# Altium PCB AAS_module_rev1_2_PANEL.PcbDoc
Units mm, origin at the board's own origin, x right, y up, seen from the top; angles counter-clockwise.
Board outline 166 x 166 mm, 2 copper layers (Component Side, Bottom Layer), stack 0.971 mm thick; 4 components, 108 nets, 4 pads, 0 vias.
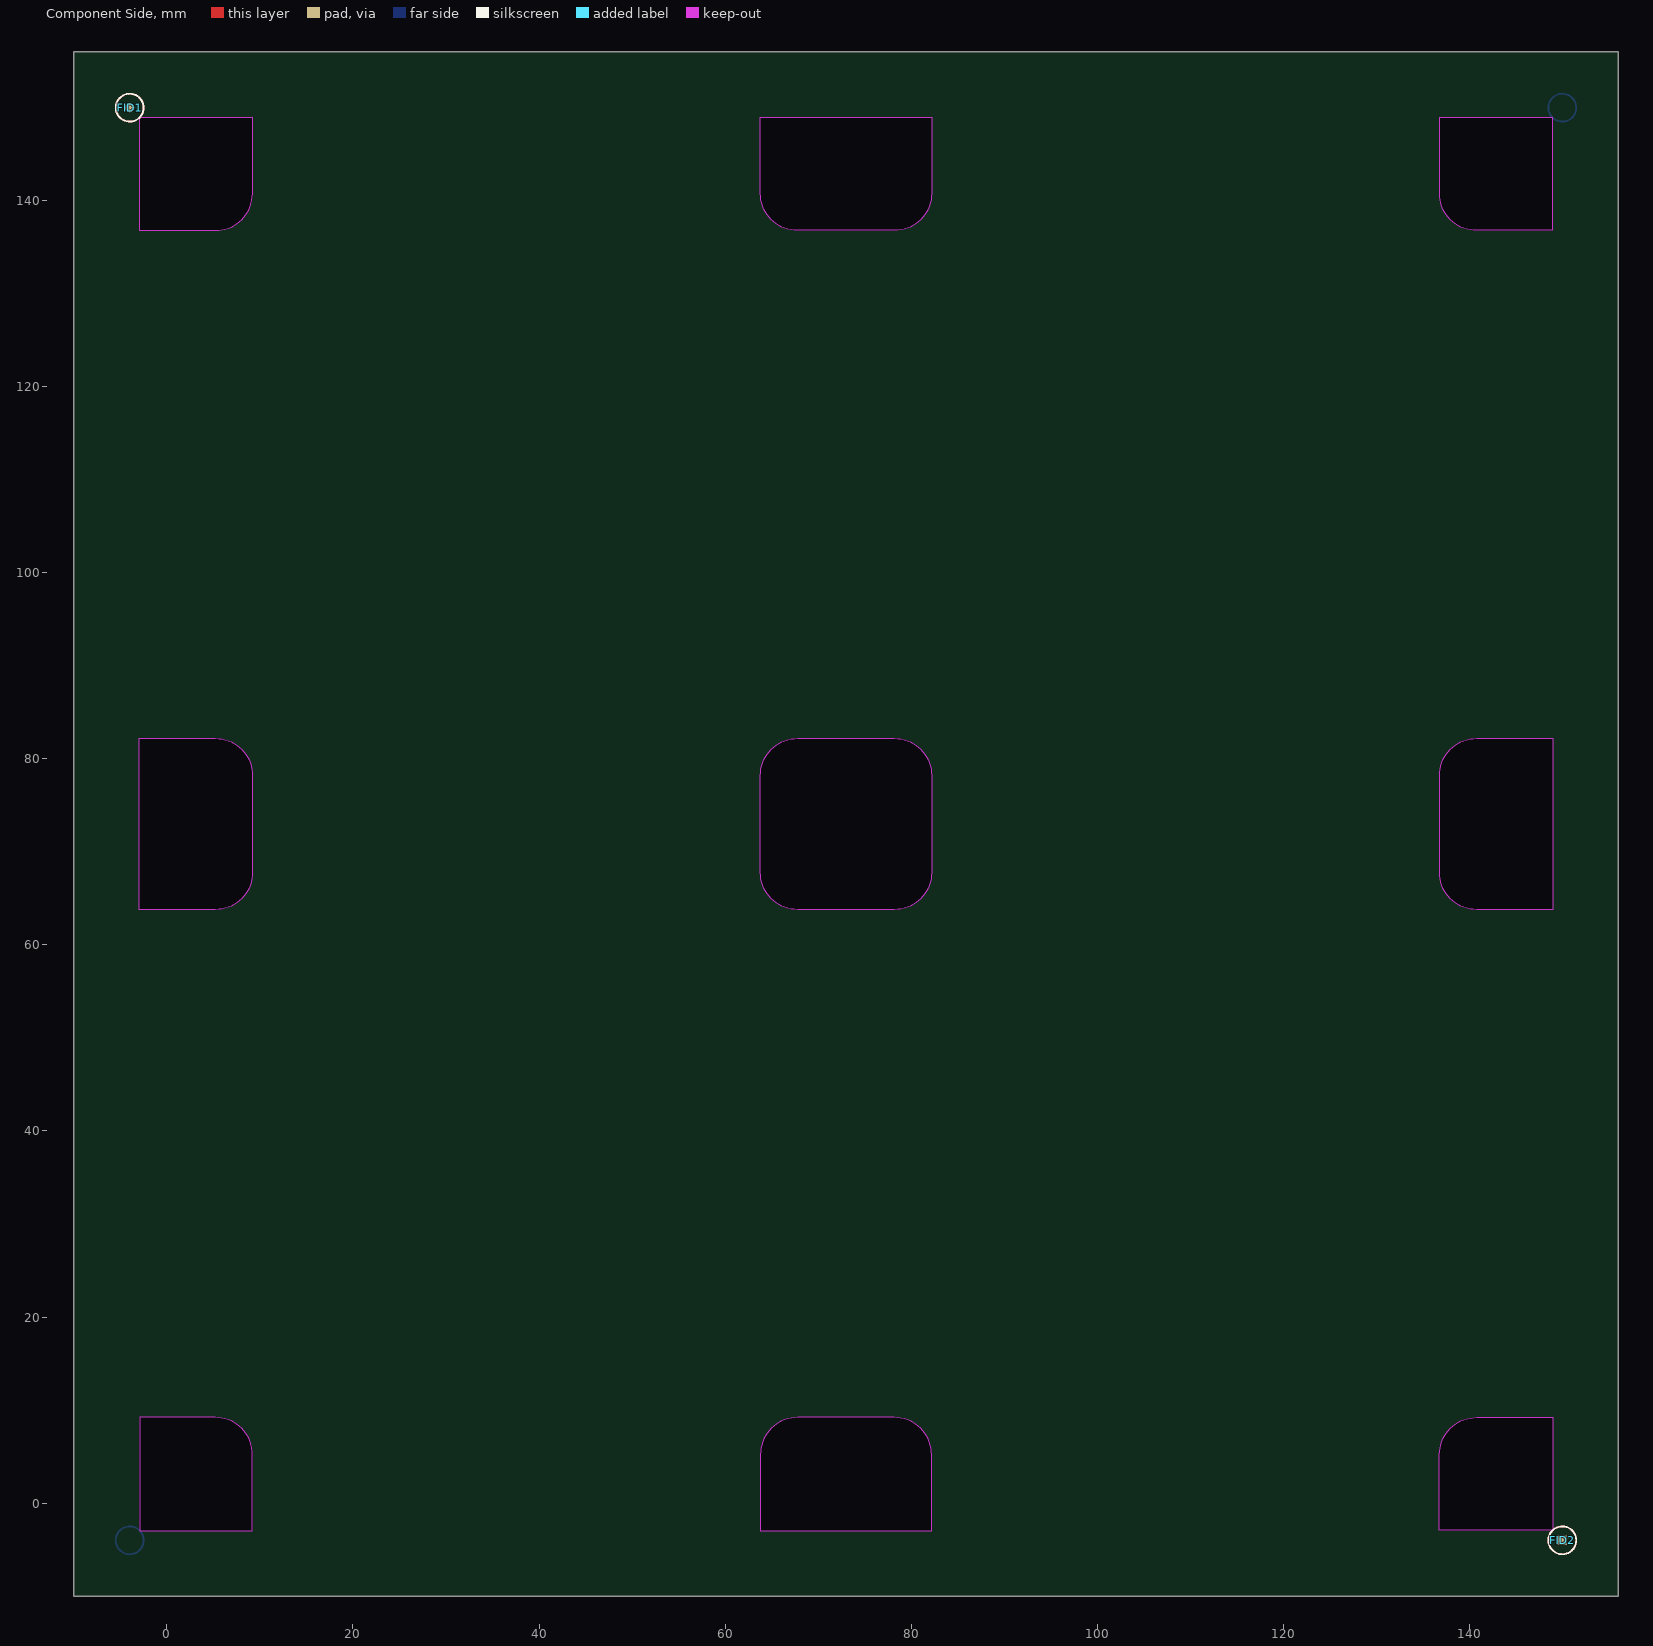
[diagram p0: Component Side view]
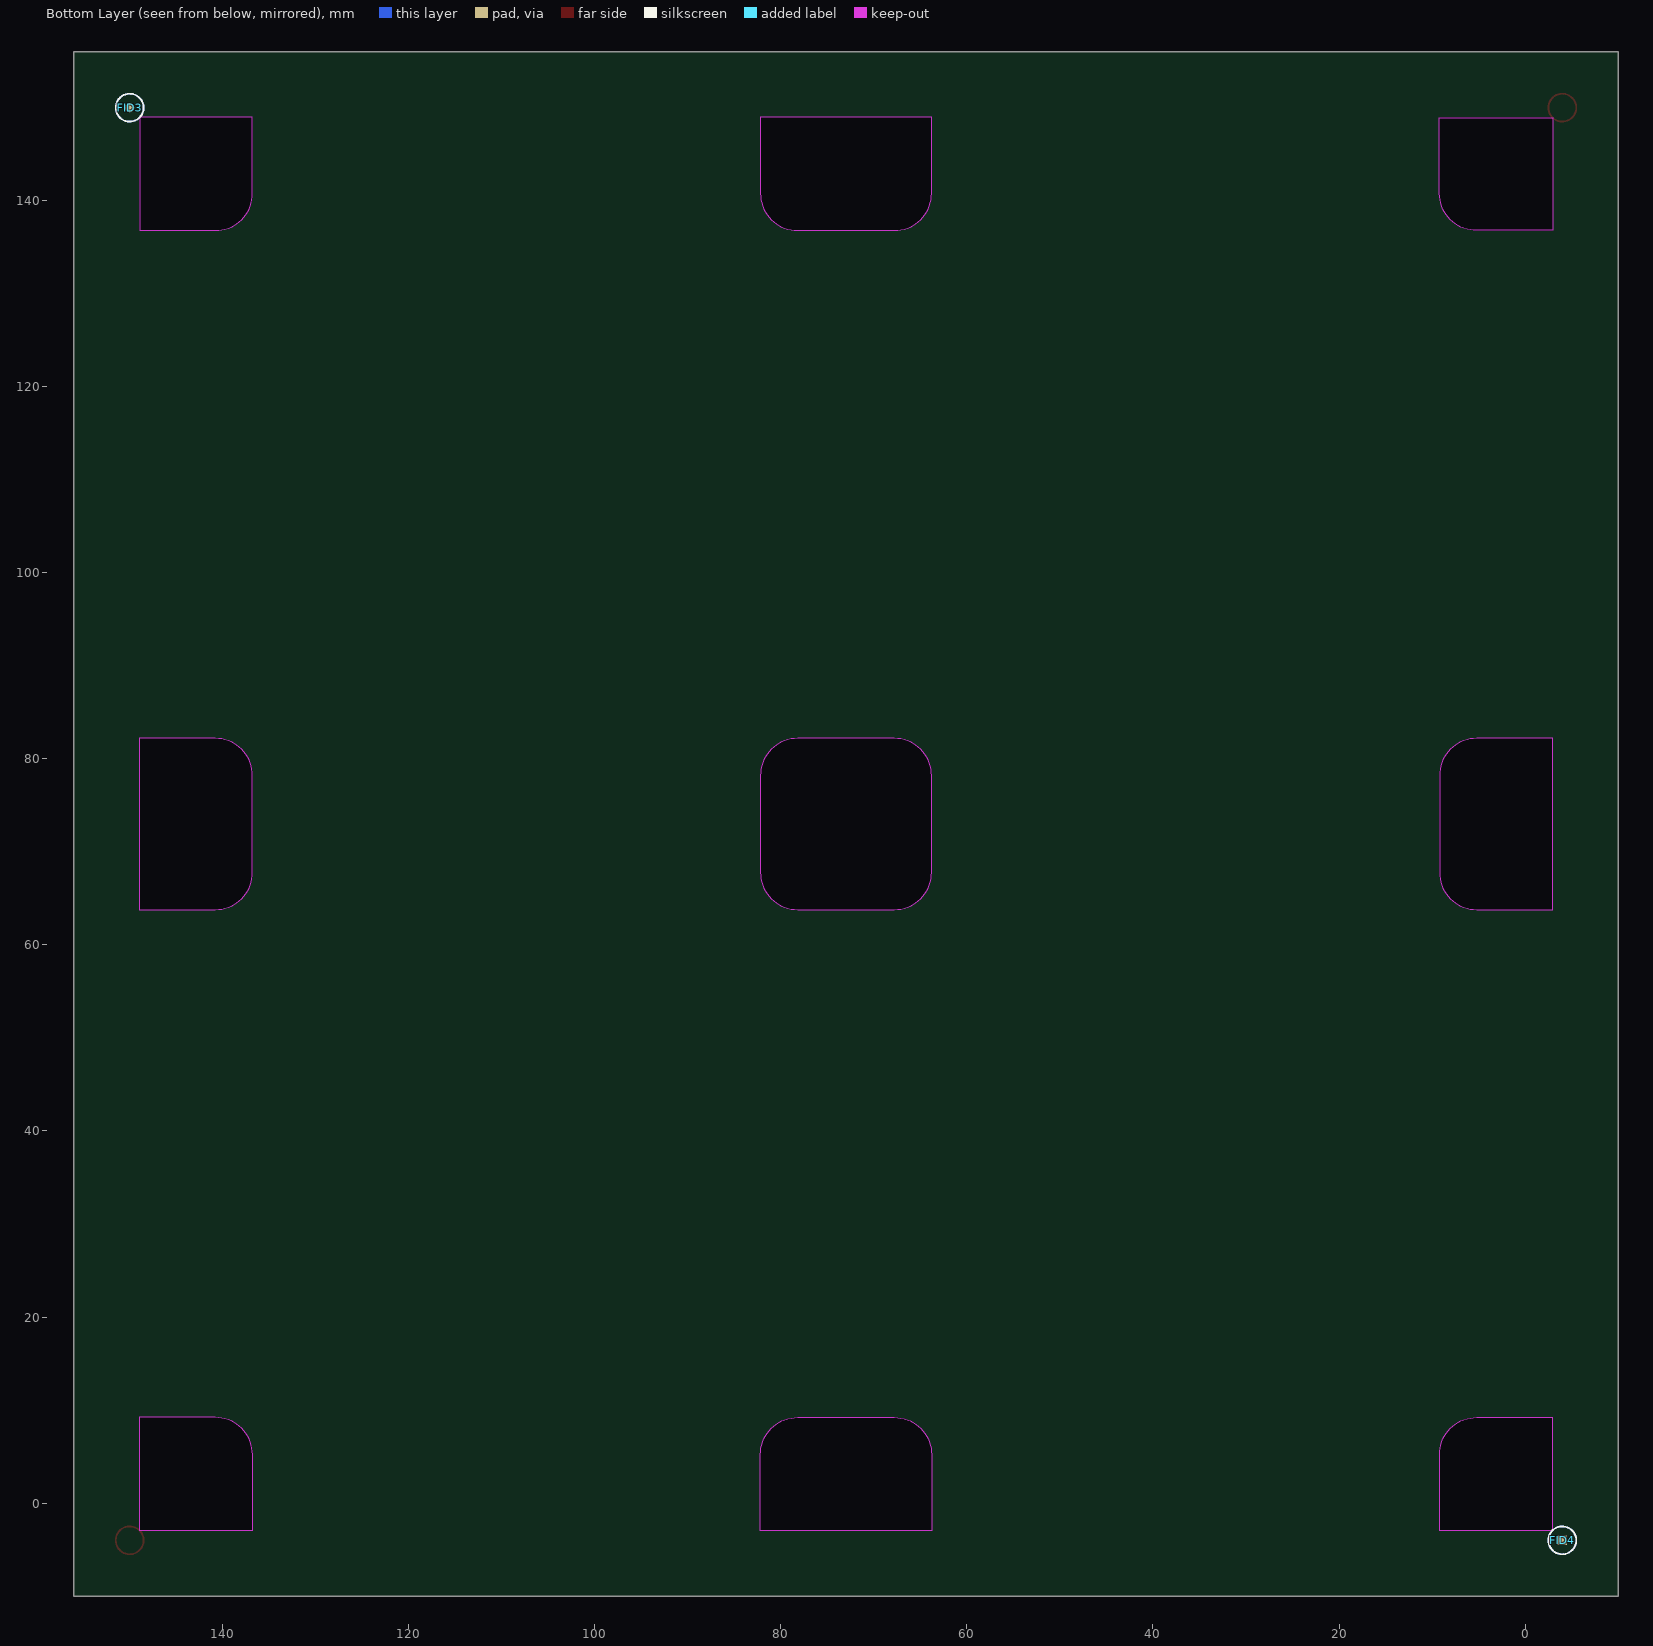
[diagram p1: Bottom Layer view, seen from below]

## Layer stack, top to bottom
Top Solder: solder mask 0.0102, Solder Resist, Dk 3.5
Component Side: signal copper 0.0356
Dielectric 1: core 0.9, FR-4, Dk 4.2
Bottom Layer: signal copper 0.0356
Solder Side: solder mask 0.0102, Solder Resist, Dk 3.5

## Board outline
-10,-10 -10,156 156,156 156,-10
cut-out: 136.8,140.8 136.8,149 148.9,149 148.9,136.8 140.8,136.8 cw(c140.8,140.8)
cut-out: -3,136.8 5.2,136.8 ccw(c5.2,140.8) 9.2,140.8 9.2,148.9 -3,148.9
cut-out: -2.9,-2.999 9.2,-2.999 9.2,5.201 ccw(c5.2,5.201) 5.2,9.201 -2.9,9.201
cut-out: 136.8,-2.9 136.8,5.2 cw(c140.8,5.2) 140.8,9.2 149,9.2 149,-2.9
cut-out: 136.8,67.8 136.8,78.2 cw(c140.8,78.2) 140.8,82.2 149,82.2 149,63.8 140.8,63.8 cw(c140.8,67.8)
cut-out: 136.8,67.8
cut-out: 136.8,67.8
cut-out: 67.8,136.8 cw(c67.8,140.8) 63.8,140.8 63.8,149 82.2,149 82.2,140.8 cw(c78.2,140.8) 78.2,136.8
cut-out: 63.8,-3 82.2,-3 82.2,5.2 ccw(c78.2,5.2) 78.2,9.2 67.8,9.2 ccw(c67.8,5.2) 63.8,5.2
cut-out: 136.8,67.8
cut-out: -3,63.8 -3,82.2 5.2,82.2 cw(c5.2,78.2) 9.2,78.2 9.2,67.8 cw(c5.2,67.8) 5.2,63.8
cut-out: 136.8,67.8
cut-out: 63.8,67.8 63.8,78.2 cw(c67.8,78.2) 67.8,82.2 78.2,82.2 cw(c78.2,78.2) 82.2,78.2 82.2,67.8 cw(c78.2,67.8) 78.2,63.8 67.8,63.8 cw(c67.8,67.8)

## Design rules (kind name [scope] priority, off if disabled: settings)
Clearance USB_THT_hole [(ObjectKind = 'Pad') And (Layer = 'MultiLayer') And (Component = 'J200')] p1: gap=0 ignorepadtopadclearanceinfootprint=FALSE
Clearance Outline [IsBoardCutoutRegion] p2: gap=0 ignorepadtopadclearanceinfootprint=FALSE
Clearance Global [All] p3: gap=0.2 ignorepadtopadclearanceinfootprint=FALSE except(0: Arc-Hole Track-Hole SMDPad-Hole THPad-Hole Via-Hole Fill-Hole Poly-Hole Region-Hole Text-Hole)
ComponentClearance ComponentClearance_2 [All] p1 off: gap=0.254 collisioncheckmode=3 verticalgap=0.254 showdistances=FALSE
ComponentClearance [All] p2 off: gap=0.254 collisioncheckmode=3 verticalgap=0.254 showdistances=FALSE
DiffPairsRouting ETHERNET_GAP [InDifferentialPairClass('ETHERNET')] p1: maxlimit=0.508 minlimit=0.305 mostfreqgap=0.305 toplayer_minwidth=0.152 toplayer_maxwidth=0.305 toplayer_prefwidth=0.305 bottomlayer_minwidth=0.152 bottomlayer_maxwidth=0.305 bottomlayer_prefwidth=0.305 maxuncoupledlength=10
DiffPairsRouting USB_GAP [InDifferentialPairClass('USB')] p2: maxlimit=0.508 minlimit=0.203 mostfreqgap=0.305 toplayer_minwidth=0.152 toplayer_maxwidth=0.203 toplayer_prefwidth=0.203 bottomlayer_minwidth=0.152 bottomlayer_maxwidth=0.203 bottomlayer_prefwidth=0.203 maxuncoupledlength=10
FabricationTestPointUsage TestPointUsage [All] p1: valid=0 allowmultiple=FALSE
FabricationTestpoint Testpoint [All] p1: side=3 testpointundercomponent=TRUE minsize=1.016 maxsize=2.54 preferedsize=1.524 minholesize=0.508 maxholesize=1.016 preferedholesize=0.813 testpointgrid=0.025 allowsidetop=TRUE allowsidebottom=TRUE usegrid=TRUE gridtolerance=0
Height [All] p1: minheight=0 maxheight=35 prefheight=12.7
HoleSize [All] p1: absolutevalues=TRUE maxlimit=6 minlimit=0.3 maxpercent=80.000 minpercent=20.000
MaxMinImpedance [InNetClass('HDMI')] p1: minimum=90,00 maximum=110,0
MinimumSolderMaskSliver [All] p1: minsoldermaskwidth=0.145
PolygonConnect DIODE [IsNamedPolygon('NETC18_1_L01_P010')  OR IsNamedPolygon('NETC18_1_L02_P011')    OR IsNamedPolygon('NETC22_1_L01_P015')    OR IsNamedPolygon('DIODE_C_BOTTOM')] p1: connectstyle=Direct reliefconductorwidth=0.254 reliefentries=4 polygonreliefangle="90 Angle" airgapwidth=0.254
PolygonConnect "Spacer holes" [(ObjectKind = 'Pad') And (Net = 'GND') And (AsMM(HoleDiameter) = 2)] p2: connectstyle=Direct reliefconductorwidth=0.254 reliefentries=4 polygonreliefangle="90 Angle" airgapwidth=0.254
PolygonConnect [All] p3: thpad.connectstyle=Relief thpad.reliefconductorwidth=0.4 thpad.reliefentries=4 thpad.polygonreliefangle="90 Angle" thpad.airgapwidth=0.25 smdpad.connectstyle=Relief smdpad.reliefconductorwidth=0.25 smdpad.reliefentries=4 smdpad.polygonreliefangle="90 Angle" smdpad.airgapwidth=0.2 via.connectstyle=Direct via.reliefconductorwidth=0.254 via.reliefentries=4 via.polygonreliefangle="90 Angle" via.airgapwidth=0.254
RoutingVias [All] p1: holewidth=0.3 width=0.6 viastyle="Through Hole" minholewidth=0.3 minwidth=0.6 maxholewidth=1.1 maxwidth=2.4
ShortCircuit "POD MERICIM MODULEM" [HasFootprint('PMUE-R1.1')] p1: allowed=TRUE
ShortCircuit [All] p2: allowed=FALSE
SilkToSilkClearance [All] p1: silktosilkclearance=0
SilkToSolderMaskClearance [IsPad] p1: minsilkscreentomaskgap=0 clearancetoexposedcopper=TRUE
SolderMaskExpansion [All] p1: expansion=0.102
Width [All] p1: maxlimit=5 minlimit=0.15 preferedwidth=0.2
20 further rules are at their usual default settings.

## Classes and differential pairs
net class POE: NetC301_2 NetC302_2 NetC303_2 NetC304_2 NetC305_1 "PAIR 1-2" "PAIR 3-6" "PAIR 4-5" "PAIR 7-8"
differential pair TX: +TX_P -TX_N
differential pair RX: +RX_P -RX_N
differential pair RXin: +RXin_P -RXin_N
differential pair TXin: +TXin_P -TXin_N

## Components (designator, comment, footprint, x,y, rotation, side; value= is the part's Value field where it differs from the comment)
FID1 "FID_CIRCLE" FID-CIRCLE1MM -4,150 r90 top (schematic designator FID102)
FID2 "FID_SQUARE" FID-SQUARE1MM 150,-4 r90 top (schematic designator FID103)
FID3 "FID_CIRCLE" FID-CIRCLE1MM 150,150 r90 bottom (schematic designator FID102)
FID4 "FID_SQUARE" FID-SQUARE1MM -4,-4 r90 bottom (schematic designator FID103)

## Footprints (in the part's own frame and the unit in brackets; to place one, negate y for a bottom-side part, rotate by r counter-clockwise, add the part's x,y. Pads: shape width x height; smd on the part's side, far side on the other; paste and mask are expansions set on the pad)
FID-CIRCLE1MM [mm]
  round 1 smd: 0(0,0)
  Component Side circle w0.2: c0,0 r1.5
  silkscreen extent -1.5,-1.5 1.5,1.5
FID-SQUARE1MM [mm]
  rect 1x1 smd: 0(0,0)
  Component Side circle w0.2: c0,0 r1.5
  silkscreen extent -1.5,-1.5 1.5,1.5

## Nets (pads, with @x,y where several pads share a name; then routed paths per layer and width w, separated by ;. In a path a pad name is that pad's centre, name@x,y a point inside that pad or via, vN(x,y) a via of type N, cw(c..) or ccw(c..) an arc to the next point about the centre after c; other vN are vias at no path point)
0: 
1: 
2: 
3: 
3V3: 
4: 
5: 
5V: 
C\H\A\N\G\E\: 
G: 
GND: 
I2C0_SCL: 
I2C0_SDA: 
L\E\D\_\C\S\: 
LED1: 
LED2: 
LED_CLOCK: 
LED_CS: 
LED_DATA: 
LED_LINK: 
LED_RX: 
LED_SPEED: 
LED_TX: 
NetC217_2: 
NetC301_2: 
NetC302_2: 
NetC303_2: 
NetC304_2: 
NetC305_1: 
NetC306_1: 
NetC306_2: 
NetC314_2: 
NetC322_2: 
NetD200_K: 
NetD201_K: 
NetD202_5: 
NetD202_6: 
NetD203_5: 
NetD203_6: 
NetD204_5: 
NetD204_6: 
NetD206_K: 
NetD207_K: 
NetD208_A: 
NetD208_K: 
NetD300_3: 
NetD300_4: 
NetD315_A: 
NetD315_K: 
NetJ200_2: 
NetJ200_3: 
NetJ300_9: 
NetJ300_11: 
NetQ300_3: 
NetQ301_D: 
NetQ302_B: 
NetR201_2: 
NetR210_2: 
NetR211_2: 
NetR304_1: 
NetR305_1: 
NetR306_2: 
NetR309_2: 
NetR316_1: 
NetR404_1: 
NetR405_1: 
NetR406_1: 
NetR407_1: 
NetR408_1: 
NetR409_1: 
NetR410_1: 
NetU201_3: 
NetU201_6: 
O_LED_CLOCK: 
O_LED_DATA: 
"PAIR 1-2": 
"PAIR 3-6": 
"PAIR 4-5": 
"PAIR 7-8": 
PoE_Vin: 
R\e\a\d\e\r\_\R\S\T\: 
R\E\S\E\T\: 
"Reader IOR": 
RX_N: 
RX_P: 
RXin_N: 
RXin_P: 
SPI0_CLK: 
SPI0_CS: 
SPI0_MISO: 
SPI0_MOSI: 
SPI1_CLK: 
SPI1_CS: 
SPI1_MISO: 
SPI1_MOSI: 
TX_N: 
TX_P: 
TXin_N: 
TXin_P: 
UART0_RX: 
UART0_TX: 
UART1_RX: 
UART1_TX: 
UART2_RX: 
UART2_TX: 
USB-DM1: 
USB-DP1: 
Vin: 
pads on no net: FID1.0 FID2.0 FID3.0 FID4.0

## Silkscreen, mask and mechanical layers (free items; w line width, h text height)
V-groove:
  lines w0.2: -10,0 156,0 ; -10,73 156,73 ; -10,146 156,146 ; 0,-10 0,156 ; 73,-10 73,156 ; 146,-10 146,156
Mechanical 11:
  lines w0.2: 9.2,78.2 ccw(c5.2,78.2) 5.2,82.2 -3,82.2 -3,63.8 5.2,63.8 ccw(c5.2,67.8) 9.2,67.8 9.2,78.2 ; 9.2,78.2 9.2,78.2 ; 63.8,78.2 cw(c67.8,78.2) 67.8,82.2 78.2,82.2 cw(c78.2,78.2) 82.2,78.2 82.2,67.8 ; 63.8,78.2 63.8,67.8 ccw(c67.8,67.8) 67.8,63.8 78.2,63.8 ccw(c78.2,67.8) 82.2,67.8 ; 63.8,78.2 63.8,78.2 ; 67.8,9.2 ccw(c67.8,5.2) 63.8,5.2 63.8,-3 82.2,-3 82.2,5.2 ccw(c78.2,5.2) 78.2,9.2 67.8,9.2 ; 67.8,9.2 67.8,9.2 ; 78.2,136.8 ccw(c78.2,140.8) 82.2,140.8 82.2,149 63.8,149 63.8,140.8 ccw(c67.8,140.8) 67.8,136.8 78.2,136.8 ; 78.2,136.8 78.2,136.8 ; 82.2,67.8 82.2,67.8 ; 136.8,67.8 ccw(c140.8,67.8) 140.8,63.8 149,63.8 149,82.2 140.8,82.2 ccw(c140.8,78.2) 136.8,78.2 136.8,67.8 ; 136.8,67.8 136.8,67.8 ; -10,-10 -10,156 156,156 156,-10 -10,-10 ; -3,136.8 5.2,136.8 ccw(c5.2,140.8) 9.2,140.8 9.2,148.9 -3,148.9 -3,136.8 ; -2.9,-2.999 9.2,-2.999 9.2,5.201 ccw(c5.2,5.201) 5.2,9.201 -2.9,9.201 -2.9,-2.999 ; 136.8,-2.9 136.8,5.2 cw(c140.8,5.2) 140.8,9.2 149,9.2 149,-2.9 136.8,-2.9 ; 136.8,140.8 ccw(c140.8,140.8) 140.8,136.8 148.9,136.8 148.9,149 136.8,149 136.8,140.8

## Panel: embedded boards
"AAS_module_rev1_2.PcbDoc" at 0,0, 2 rows x 2 columns, spacing 73 x 73, rotation 0